# Altium PCB Batt_Protection.PcbDoc
Units mil, origin at the board's own origin, x right, y up, seen from the top; angles counter-clockwise.
Board outline 815 x 1370 mil, 2 copper layers (Top Layer, Bottom Layer); 8 components, 8 nets, 27 pads, 8 vias.
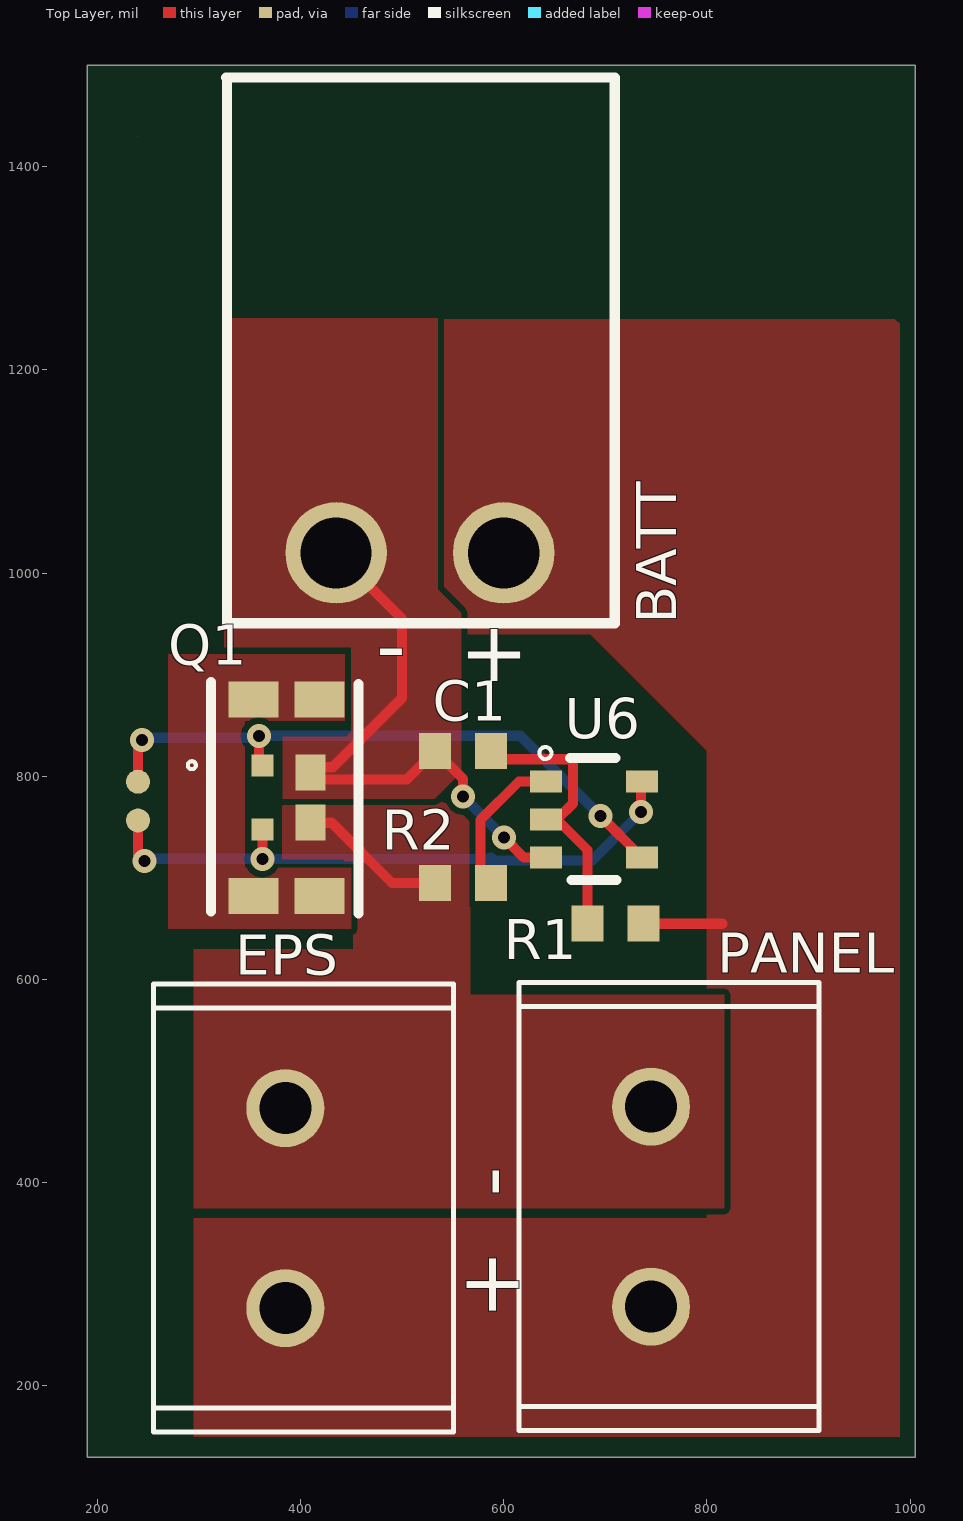
[diagram p0: Top Layer view]
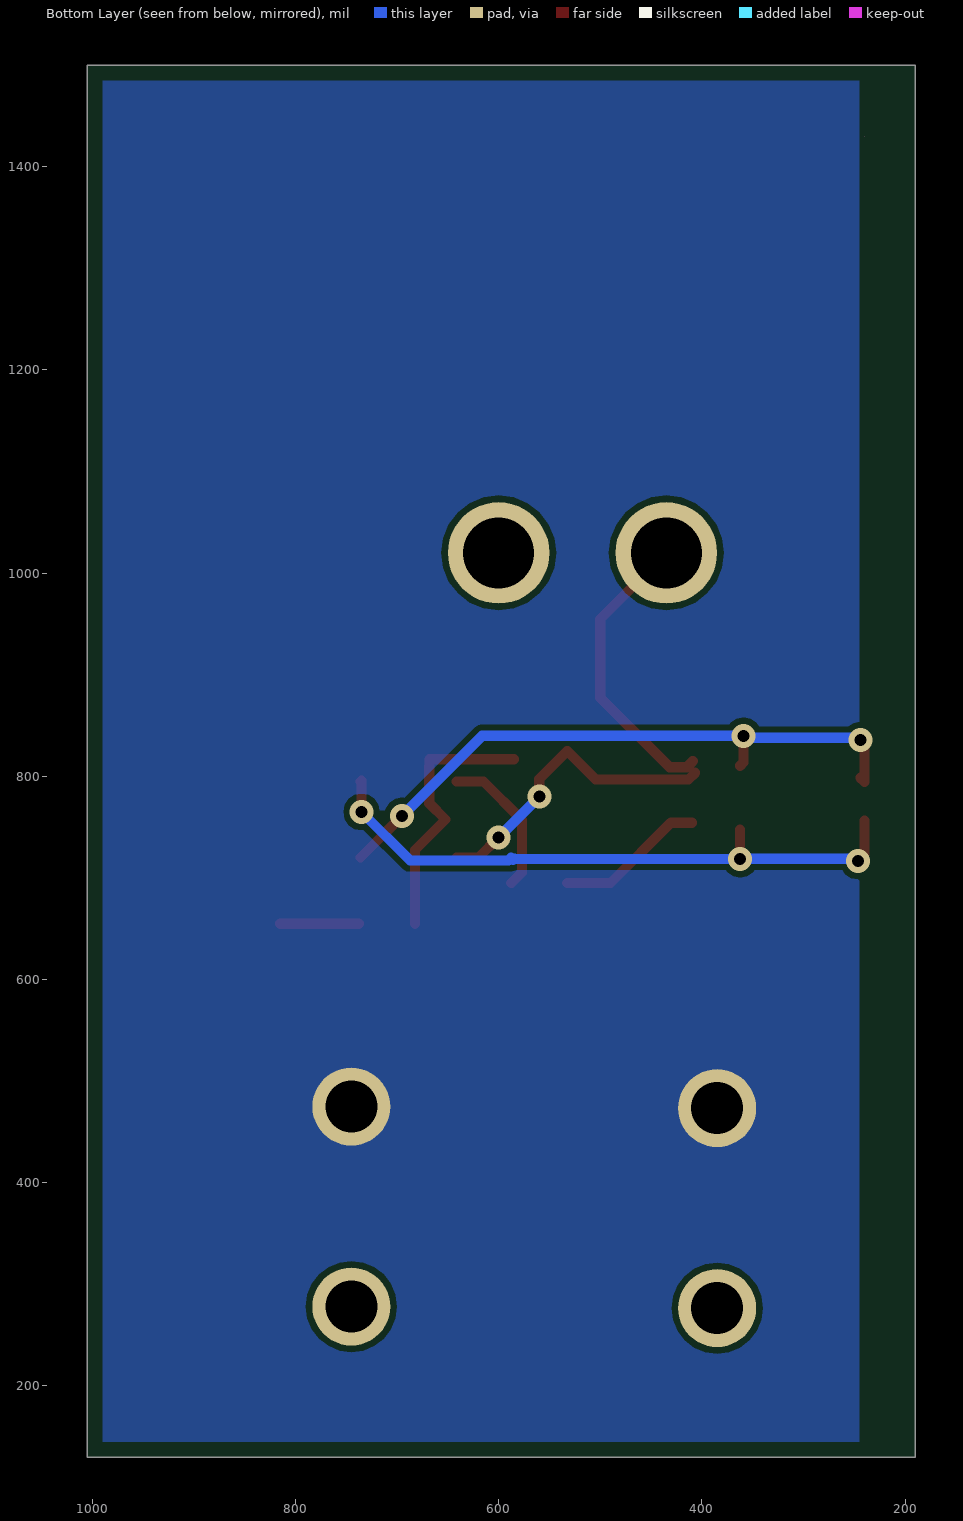
[diagram p1: Bottom Layer view, seen from below]
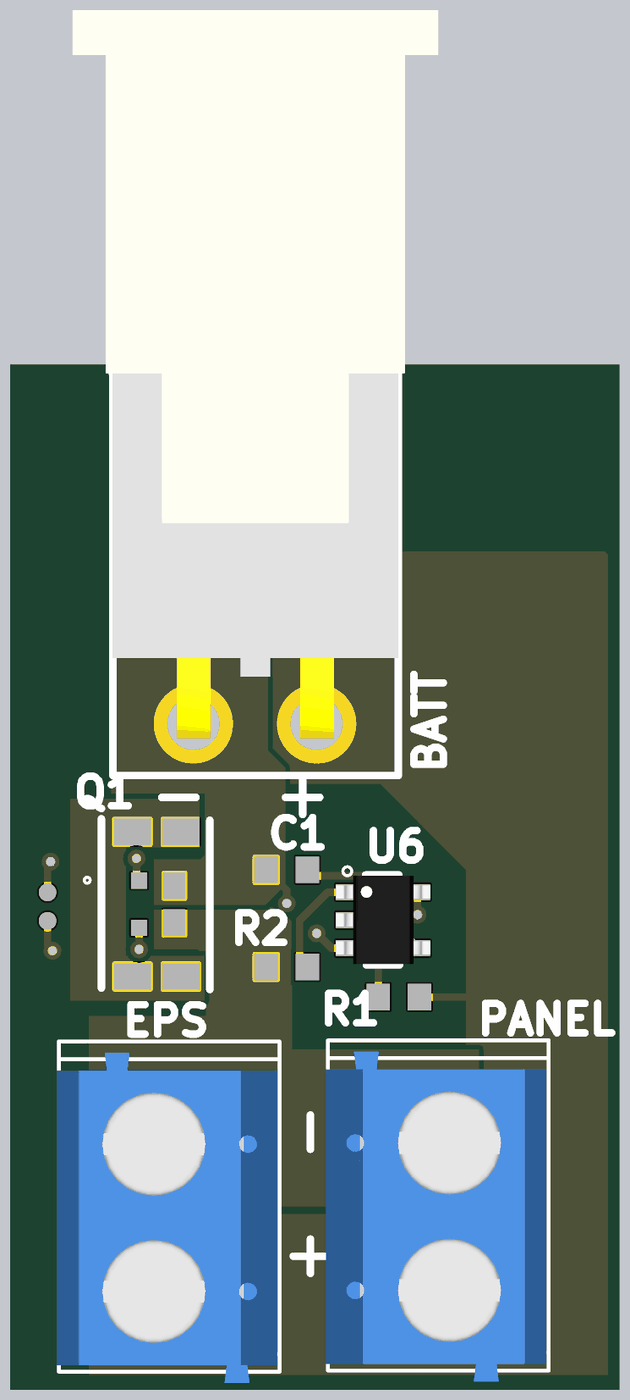
[diagram p2: 3D render of the assembled board from above, using the file's embedded part models]

## Layer stack, top to bottom
Top Solder: solder mask 0.4, Solder Resist, Dk 3.5
Top Layer: signal copper 1.4
Dielectric 1: dielectric 12.6, FR-4, Dk 4.8
Bottom Layer: signal copper 1.4
Bottom Solder: solder mask 0.4, Solder Resist, Dk 3.5

## Board outline
190,130 190,1500 1005,1500 1005,130
cut-out: 240,1430

## Design rules (kind name [scope] priority, off if disabled: settings)
AssemblyTestPointUsage [All] p1 off:
AssemblyTestpoint [All] p1 off: testpointundercomponent=TRUE minsize=40 maxsize=100 preferedsize=60 minholesize=0 maxholesize=40 preferedholesize=32 testpointgrid=1 usegrid=TRUE gridtolerance=0.01 allowsidetop=TRUE allowsidebottom=TRUE
BoardOutlineClearance [OnLayer('VCC') or OnLayer('GND')] p1: gap=20 ignorepadtopadclearanceinfootprint=FALSE // Inner layer clearance
BoardOutlineClearance BoardOutlineClearance_1 [All] p2: gap=15 ignorepadtopadclearanceinfootprint=FALSE // top and bottom layers
Clearance [All] p1: gap=6 ignorepadtopadclearanceinfootprint=FALSE
FabricationTestPointUsage [All] p1 off: valid=0 allowmultiple=FALSE
FabricationTestpoint [All] p1 off: side=3 testpointundercomponent=FALSE minsize=40 maxsize=100 preferedsize=60 minholesize=0 maxholesize=40 preferedholesize=32 testpointgrid=1 allowsidetop=TRUE allowsidebottom=TRUE usegrid=TRUE gridtolerance=0.01
HoleSize [All] p1: absolutevalues=TRUE maxlimit=248.03 minlimit=11.81 maxpercent=80.000 minpercent=20.000
HoleToHoleClearance [All] p1: gap=10 allowstackedmicrovias=FALSE
MinimumAnnularRing [All] p1: minimumring=6
MinimumSolderMaskSliver [All] p1: minsoldermaskwidth=4
PlaneConnect [All] p1: planeconnectstyle=Direct reliefexpansion=20 reliefentries=4 reliefconductorwidth=10 reliefairgap=10
PolygonConnect [All] p1: connectstyle=Direct reliefconductorwidth=10 reliefentries=4 polygonreliefangle="90 Angle" airgapwidth=10
RoutingVias [All] p1: holewidth=11.81 width=23.62 viastyle="Through Hole" minholewidth=7.87 minwidth=23.62 maxholewidth=248.03 maxwidth=393.7
SilkToSilkClearance [All] p1: silktosilkclearance=0
SilkToSolderMaskClearance [IsPad] p1: minsilkscreentomaskgap=3 clearancetoexposedcopper=TRUE
SolderMaskExpansion [All] p1: expansion=2.5
UnConnectedPin [All] p1:
UnRoutedNet [All] p1: checkbadconnections=TRUE
Width [All] p1: maxlimit=100 minlimit=6 preferedwidth=10
19 further rules are at their usual default settings.

## Components (designator, comment, footprint, x,y, rotation, side; value= is the part's Value field where it differs from the comment)
BATT "Header 2" SAM9552-ND 520,1020 r0 top
C1 "100nF" 1608[0603] 560,825 r0 top value=0.1uF
EPS "Header 2" CON2_SCREW_5.00MM_691102710002 385,375 r90 top
PANEL "Header 2" CON2_SCREW_5.00MM_691102710002 745,376.57 r90 top
Q1 "IRL6297SDPbF" IRL6297SDPbF 386,779 r270 top
R1 "330Ohms" 1608[0603] 710,655 r180 top value=1K
R2 "2.7K" 1608[0603] 560,695 r0 top value=1K
U6 "AP9101C" AP9101C-776313 695,755 r90 top

## Footprints (in the part's own frame and the unit in brackets; to place one, negate y for a bottom-side part, rotate by r counter-clockwise, add the part's x,y. Pads: shape width x height; smd on the part's side, far side on the other; paste and mask are expansions set on the pad)
1608[0603] [mm] "Chip Capacitor, Body 1.6x0.8mm, IPC High Density"
  rect 0.8x0.9 smd: 1(-0.7,0) 2(0.7,0)
  body extent -0.87,-0.48 0.87,0.48, height 1.3
AP9101C-776313 [mm] "High precision battery protection circuit"
  rect 0.55x0.8 smd: 1(1.016,1.359) 2(0.066,1.359) 3(-0.884,1.359) 4(-0.884,-1.041) 5(1.016,-1.041)
  silkscreen extent -1.45,-0.41 1.88,1.52, body extent -1.43,-1.45 1.57,1.75, height 0.92
CON2_SCREW_5.00MM_691102710002 [mm] "2-Pos Screw terminal 5mm pitch"
  round 1.95 hole 1.3: 1(-2.5,0) 2(2.5,0)
  silkscreen extent -5.6,-4.2 5.6,3.3, body extent -5.98,-6.6 5.22,3.37, height 10.03
IRL6297SDPbF [mm] "Dual N-Channel Power MOSFET for Charge and Discharge Switching"
  rect 0.55x0.55 smd: 1(-0.8,-0.6) 4(0.8,-0.6)
  rect 0.9x0.75 smd: 2(-0.625,0.6) 5(0.625,0.6)
  rect 0.9x1.25 smd: 3(-2.455,-0.825) 3(-2.455,0.825) 6(2.455,-0.825) 6(2.455,0.825)
  silkscreen extent -2.9,-2.46 2.9,1.8, body extent -2.41,-1.78 2.49,1.78, height 0.7
SAM9552-ND [mil] "Samtec Connector Through Hole, Right Angle 2 pos 0.165\" (4.20mm) pitch"
  round 100 hole 70 mask+3: 1(80,0) 2(-85,0)
  silkscreen extent -193,-69 189,468, body extent -247,-19 243,953, height 386

## Part data
BATT EPS PANEL: "Header, 2-Pin", LatestRevisionDate=17-Jul-2002, LatestRevisionNote="Re-released for DXP Platform.", Publisher="Altium Limited"
C1: library part Capacitor, "SMT Capacitor"
Q1: "Dual N-Channel Power MOSFET"
R1 R2: library part Resistor, "SMT Resistor"
U6: "Battery Protection IC"

## Free pads (board coordinates)
  round 23.62 smd: 5(240,756.73) 8(240,794.73)

## Via types
v1: diameter 23.62, hole 11.81, Top Layer to Bottom Layer, tented both sides, 8 vias

## Nets (pads, with @x,y where several pads share a name; then routed paths per layer and width w, separated by ;. In a path a pad name is that pad's centre, name@x,y a point inside that pad or via, vN(x,y) a via of type N, cw(c..) or ccw(c..) an arc to the next point about the centre after c; other vN are vias at no path point)
+PACK: BATT.1 EPS.1 PANEL.1 R1.1 | length 77.4
  Top Layer w10: R1.1 815,655
-PACK: EPS.2 PANEL.2 Q1.5 R2.1 | length 147.5
  Top Layer w10: Q1.5 409.68,754.45 430.55,754.45 490,695 R2.1
C_GATE: pad.5 Q1.4 U6.5 | length 616.5
  Top Layer w10: pad.5 240,723.27 v1(246.53,716.73) ; v1@362,719 v1(362.38,718.62) Q1.4 ; v1(735,765) 735,796 U6.5
  Bottom Layer w10: v1(246.53,716.73) 248.8,719 362,719 v1(362.38,718.62) 584.36,718.62 584.74,719 585.74,718 587.74,720 590.55,717.19 687.19,717.19 v1(735,765)
D_GATE: pad.8 Q1.1 U6.4 | length 625.1
  Top Layer w10: pad.8@244,798.73 pad.8 240,831.73 v1(244,835.73) v1@246.53,835.73 ; v1(359,840) 359,813.87 Q1.1 ; v1(695,761.2) U6.4
  Bottom Layer w10: v1(244,835.73) 246.27,838 357,838 v1(359,840) 616.2,840 v1(695,761.2)
D_SOURCE: BATT.2 C1.1 Q1.2 U6.3 | length 594.3
  Top Layer w10: Q1.2@406.62,803.61 413.23,797 504.44,797 C1.1 560,797.44 v1(560,780) ; Q1.2@409,815 415,809 431.75,809 500,877.25 500,955 BATT.2 ; v1(600,740) 619.8,720.2 U6.3
  Bottom Layer w10: v1(560,780) v1(600,740)
DRAIN: Q1.3 Q1.6
VDD: C1.2 R1.2 U6.2 | length 264
  Top Layer w10: C1.2@585,816.83 668.17,816.83 668.17,810.47 668.26,810.38 668.26,773.46 652.4,757.6 682.44,727.56 R1.2
VM: R2.2 U6.1 | length 146.5
  Top Layer w10: R2.2 577.19,705.37 577.19,757.19 615,795 U6.1

## Polygon pours and split planes (outlines as drawn)
+PACK on Top Layer "Top Layer-+PACK" (solid, remove dead copper, pour order 8): 505,1250 985,1250 990,1245 990,150 295,150 295,365 800,365 800,825 685,940 505,940
DRAIN on Top Layer "Top Layer-DRAIN" (solid, remove dead copper, pour order 2): 345,855 345,710 450,710 450,650 270,650 270,920 450,920 450,855
-PACK on Top Layer "Top Layer--PACK" (solid, remove dead copper, pour order 6): 295,630 452,630 452,708 441.38,718.62 382,718.62 382,785 537,785 567,755 567,585 817,585 817,375 295,375
D_SOURCE on Top Layer "Top Layer-D_SOURCE" (solid, remove dead copper, pour order 0): 535,1251 325,1251 325,927 450,927 450,844 445,839 382.47,839 382.47,778 532,778 558,804 558,961 535,984
no net on Top Layer "Top Layer-No Net" (solid, pour order 4): 310,655
-PACK on Bottom Layer "-PACK" (solid, remove dead copper, pour order 10): 245,140 1000,140 1000,1490 245,1490

## Silkscreen, mask and mechanical layers (free items; w line width, h text height)
Top Overlay:
  text "+  -" at 625,945 h60 r180
  text "+  -" at 615,265 h60 r90

## Text inside footprints (layer, text, board x,y; h text height)
EPS: Mechanical 4 "1" at 280.67,231.3 h73.82 r270; Mechanical 4 "1" at 280.67,231.3 h73.82 r270
PANEL: Mechanical 4 "1" at 640.67,232.87 h73.82 r270; Mechanical 4 "1" at 640.67,232.87 h73.82 r270